# EAGLE board led-er-v3-module-f (EAGLE 7.5.0)
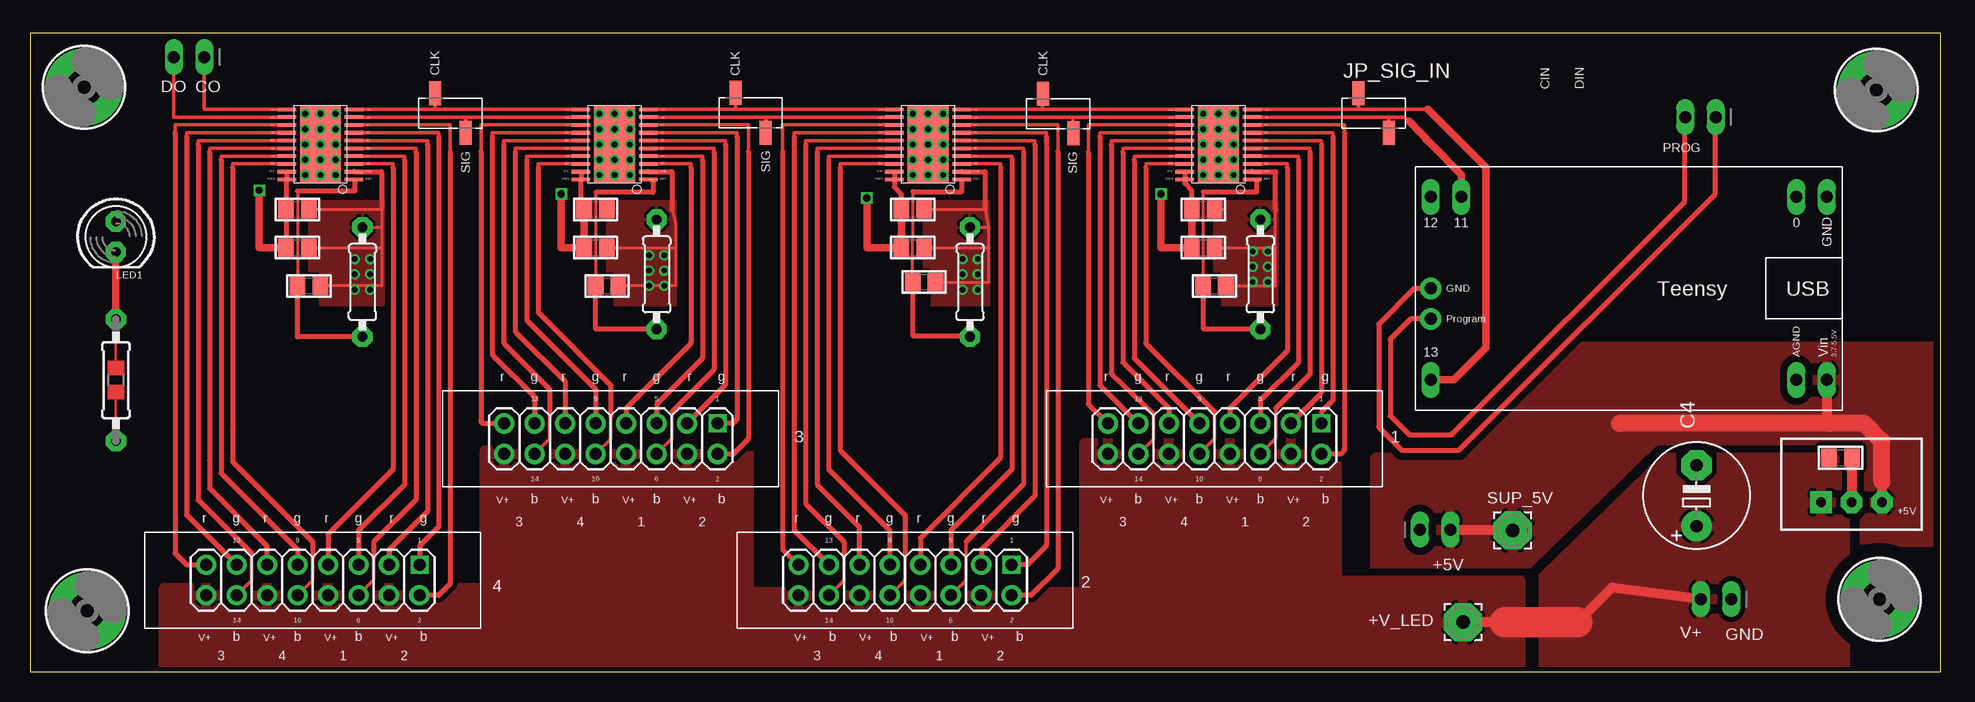
[diagram p0: board, top side]
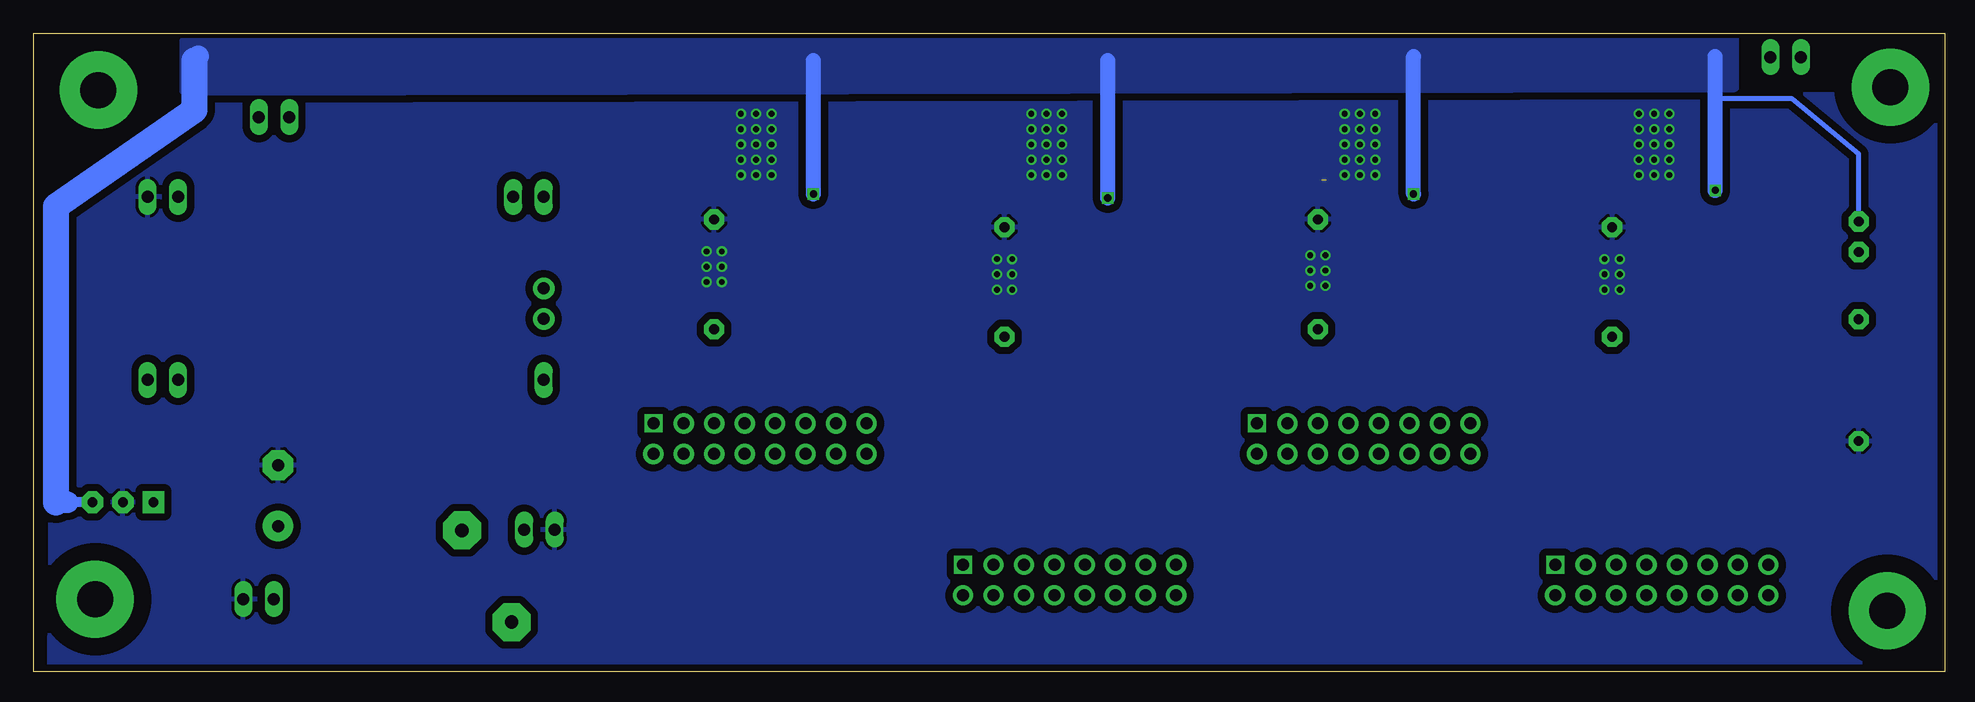
[diagram p1: board, bottom side, seen from below]

Size 159.28 x 53.23 mm. Coordinates in mm from the lower left corner, seen from the top.
Outline: 159.28,0 159.28,53.23 0,53.23 0,0 159.26,0
Copper layers (1*16): Top 0.0356mm / dielectric 1.5011mm / Bottom 0.0356mm
Design rules "LaenPCBOrder": minimum track width 6mil, minimum drill 13mil, track to track 6mil, track to pad 6mil, pad to pad 6mil, via to via 6mil, smd to smd 6mil, copper to edge 15mil, drill to drill 6mil, minimum pad ring 7mil, minimum via ring 7mil, stop-mask expansion 3mil, vias tented up to drill 0mil, thermal gap 10mil

## Footprints (pad centres in the part's own frame; a part is rotated, then mirrored left to right if it is on the bottom)
3,17/1,1 = drill 1.118 pad 3.175 octagon: 1 0,0
0805 = smd 1.3 x 1.5: 1 -0.95,0; 2 0.95,0
E5-8,5 = drill 1.016 pad 2.54: + -2.54,0 | drill 1.016 pad 2.54 octagon: - 2.54,0
1X06_SMD_STRAIGHT_ALT = smd 1 x 2: 1 0,-1.65; 2 -2.54,1.65
1X02_OVAL = drill 1 long: 1 -1.27,0; 2 1.27,0
LED5MM = drill 0.813 pad 1.676 octagon: A -1.27,0; K 1.27,0
0207/9 = drill 0.813 pad 1.676 octagon: 1 -4.572,0; 2 4.572,0
HTSSOP20DAP = smd 0.3 x 1.55: 1 -2.925,-2.8; 2 -2.275,-2.8; 3 -1.625,-2.8; 4 -0.975,-2.8; 5 -0.325,-2.8; 6 0.325,-2.8; 7 0.975,-2.8; 8 1.625,-2.8; 9 2.275,-2.8; 10 2.925,-2.8; 11 2.925,2.8; 12 2.275,2.8; 13 1.625,2.8; 14 0.975,2.8; 15 0.325,2.8; 16 -0.325,2.8; 17 -0.975,2.8; 18 -1.625,2.8; 19 -2.275,2.8; 20 -2.925,2.8 | smd 6.5 x 3.4: EXP 0,0
2X08_RIBBON = drill 1 pad 1.676: P1 -8.89,1.27; P3 -6.35,1.27; P4 -6.35,-1.27; P5 -3.81,1.27; P6 -3.81,-1.27; P7 -1.27,1.27; P8 -1.27,-1.27; P9 1.27,1.27; P10 1.27,-1.27; P11 3.81,1.27; P12 3.81,-1.27; P13 6.35,1.27; P14 6.35,-1.27; P15 8.89,1.27; P16 8.89,-1.27 | drill 1 square: P2 -8.89,-1.27
0805-THM = drill 0.813 pad 1.676 octagon: 1 -5.08,0; 2 5.08,0
TSR-1 = drill 0.8 pad 1.8 square: 1 -2.54,-1.5 | drill 0.8 pad 1.8 octagon: 2 0,-1.5; 3 2.54,-1.5
MOUNTINGHOLE_3.0_PLATED = drill 3 pad 6.452: P$1 0,0
TEENSY_LEDER = drill 1 pad 1.422 long: 0 12.7,7.62; 11 -15.24,7.62; 12 -17.78,7.62; 13 -17.78,-7.62; AGND 12.7,-7.62; GND 15.24,7.62; VIN 15.24,-7.62 | drill 1 pad 1.778: GND2 -17.78,0; PROG -17.78,-2.54

## Placement (x,y rotation side)
+V_LED  [3,17/1,1]  119.44,4.14 0 top
C3  10uF/16V  [0805]  150.92,17.84 0 top
C4  220uF+  [E5-8,5]  138.91,14.68 90 top
JP1  [1X06_SMD_STRAIGHT_ALT]  86.97,46.52 0 top
JP2  [1X06_SMD_STRAIGHT_ALT]  61.33,46.6 0 top
JP3  [1X06_SMD_STRAIGHT_ALT]  36.32,46.56 0 top
JP_5V  [1X02_OVAL]  117.13,11.85 0 top
JP_15VIN  [1X02_OVAL]  140.53,6.06 180 top
JP_PROG  [1X02_OVAL]  139.24,46.23 180 top
JP_SIG_IN  [1X06_SMD_STRAIGHT_ALT]  113.26,46.56 0 top
JP_SIGOUT  [1X02_OVAL]  13.25,51.24 180 top
LED1  Green  [LED5MM]  7.16,36.26 270 top
LED-ER1:C5  1uF/50V  [0805]  97.78,38.54 0 top
LED-ER1:C11  10uF 25V  [0805]  97.78,35.36 0 top
LED-ER1:R3  22K  [0805]  98.74,32.17 0 top
LED-ER1:R6  [0207/9]  102.56,33.13 90 top
LED-ER1:TLC1  TLC59711  [HTSSOP20DAP]  99.06,43.96 90 top
LED-ER1:U$6  HEADER-2X8-RIBBON  [2X08_RIBBON]  98.74,19.43 180 top
LED-ER2:C5  1uF/50V  [0805]  73.58,38.54 0 top
LED-ER2:C11  10uF 25V  [0805]  73.58,35.36 0 top
LED-ER2:R3  22K  [0805]  74.53,32.49 0 top
LED-ER2:R6  [0207/9]  78.35,32.49 90 top
LED-ER2:TLC1  TLC59711  [HTSSOP20DAP]  74.85,43.96 90 top
LED-ER2:U$6  HEADER-2X8-RIBBON  [2X08_RIBBON]  72.94,7.64 180 top
LED-ER3:C5  1uF/50V  [0805]  47.14,35.36 0 top
LED-ER3:C11  10uF 25V  [0805]  47.14,38.54 0 top
LED-ER3:R3  22K  [0805]  48.1,32.17 0 top
LED-ER3:R6  [0207/9]  52.24,33.13 90 top
LED-ER3:TLC1  TLC59711  [HTSSOP20DAP]  48.73,43.96 90 top
LED-ER3:U$6  HEADER-2X8-RIBBON  [2X08_RIBBON]  48.41,19.43 180 top
LED-ER4:C5  1uF/50V  [0805]  22.3,35.36 0 top
LED-ER4:C11  10uF 25V  [0805]  22.3,38.54 0 top
LED-ER4:R3  22K  [0805]  23.25,32.17 0 top
LED-ER4:R6  [0207/9]  27.71,32.49 90 top
LED-ER4:TLC1  TLC59711  [HTSSOP20DAP]  24.21,43.96 90 top
LED-ER4:U$6  HEADER-2X8-RIBBON  [2X08_RIBBON]  23.57,7.64 180 top
R2  470  [0805-THM]  7.16,24.31 90 top
SUP_5V  [3,17/1,1]  123.58,11.79 0 top
TSR1-2450  TSR1-2450  [TSR-1]  151.84,15.63 0 top
U$1  MOUNTINGHOLE  [MOUNTINGHOLE_3.0_PLATED]  153.89,48.48 0 top
U$2  MOUNTINGHOLE  [MOUNTINGHOLE_3.0_PLATED]  4.78,5.1 0 top
U$3  MOUNTINGHOLE  [MOUNTINGHOLE_3.0_PLATED]  4.51,48.72 0 top
U$4  MOUNTINGHOLE  [MOUNTINGHOLE_3.0_PLATED]  154.16,6.05 0 top
U$5  TEENSY_LEDER  [TEENSY_LEDER]  134.54,31.95 0 top

## Library data of the parts
+V_LED SUP_5V = wirepad
C3 JP_5V JP_15VIN JP_PROG JP_SIGOUT LED-ER1:C5 LED-ER1:C11 LED-ER1:R3 LED-ER2:C5 LED-ER2:C11 LED-ER2:R3 LED-ER3:C5 LED-ER3:C11 LED-ER3:R3 LED-ER4:C5 LED-ER4:C11 LED-ER4:R3 R2 U$1-U$4 = microbuilder
C4 LED1 LED-ER1:R6 LED-ER1:TLC1 LED-ER2:R6 LED-ER2:TLC1 LED-ER3:R6 LED-ER3:TLC1 LED-ER4:R6 LED-ER4:TLC1 = adafruit
JP1-JP3 JP_SIG_IN = Andrews; PROD_ID: CONN-10203
LED-ER1:U$6 LED-ER2:U$6 LED-ER3:U$6 LED-ER4:U$6 U$5 = Andrews
TSR1-2450 = SteelCaveRobotics-Power

## Nets
1SCKI: JP_SIG_IN.2 LED-ER1:TLC1.10 U$5.13
1SDTI: JP_SIG_IN.1 LED-ER1:TLC1.9 U$5.11
+5V: JP_5V.2 LED1.A LED-ER1:C5.1 LED-ER1:C11.1 LED-ER1:TLC1.19 LED-ER1:TLC1.20 LED-ER2:C5.1 LED-ER2:C11.1 LED-ER2:TLC1.19 LED-ER2:TLC1.20 LED-ER3:C5.1 LED-ER3:C11.1 LED-ER3:TLC1.19 LED-ER3:TLC1.20 LED-ER4:C5.1 LED-ER4:C11.1 LED-ER4:TLC1.19 LED-ER4:TLC1.20 SUP_5V.1 TSR1-2450.3 U$5.VIN
GND: C3.2 C4.- JP_5V.1 JP_15VIN.1 LED-ER1:C5.2 LED-ER1:C11.2 LED-ER1:R3.2 LED-ER1:R6.2 LED-ER1:TLC1.2 LED-ER1:TLC1.EXP LED-ER2:C5.2 LED-ER2:C11.2 LED-ER2:R3.2 LED-ER2:R6.2 LED-ER2:TLC1.2 LED-ER2:TLC1.EXP LED-ER3:C5.2 LED-ER3:C11.2 LED-ER3:R3.2 LED-ER3:R6.2 LED-ER3:TLC1.2 LED-ER3:TLC1.EXP LED-ER4:C5.2 LED-ER4:C11.2 LED-ER4:R3.2 LED-ER4:R6.2 LED-ER4:TLC1.2 LED-ER4:TLC1.EXP R2.1 TSR1-2450.2 U$5.GND
LED-ER1:B0: LED-ER1:TLC1.5 LED-ER1:U$6.P5
LED-ER1:B1: LED-ER1:TLC1.8 LED-ER1:U$6.P1
LED-ER1:B2: LED-ER1:TLC1.15 LED-ER1:U$6.P13
LED-ER1:B3: LED-ER1:TLC1.18 LED-ER1:U$6.P9
LED-ER1:G0: LED-ER1:TLC1.4 LED-ER1:U$6.P6
LED-ER1:G1: LED-ER1:TLC1.7 LED-ER1:U$6.P2
LED-ER1:G2: LED-ER1:TLC1.14 LED-ER1:U$6.P14
LED-ER1:G3: LED-ER1:TLC1.17 LED-ER1:U$6.P10
LED-ER1:IREF: LED-ER1:R3.1 LED-ER1:R6.1 LED-ER1:TLC1.1
LED-ER1:R0: LED-ER1:TLC1.3 LED-ER1:U$6.P8
LED-ER1:R1: LED-ER1:TLC1.6 LED-ER1:U$6.P4
LED-ER1:R2: LED-ER1:TLC1.13 LED-ER1:U$6.P16
LED-ER1:R3: LED-ER1:TLC1.16 LED-ER1:U$6.P12
LED-ER2:B0: LED-ER2:TLC1.5 LED-ER2:U$6.P5
LED-ER2:B1: LED-ER2:TLC1.8 LED-ER2:U$6.P1
LED-ER2:B2: LED-ER2:TLC1.15 LED-ER2:U$6.P13
LED-ER2:B3: LED-ER2:TLC1.18 LED-ER2:U$6.P9
LED-ER2:G0: LED-ER2:TLC1.4 LED-ER2:U$6.P6
LED-ER2:G1: LED-ER2:TLC1.7 LED-ER2:U$6.P2
LED-ER2:G2: LED-ER2:TLC1.14 LED-ER2:U$6.P14
LED-ER2:G3: LED-ER2:TLC1.17 LED-ER2:U$6.P10
LED-ER2:IREF: LED-ER2:R3.1 LED-ER2:R6.1 LED-ER2:TLC1.1
LED-ER2:R0: LED-ER2:TLC1.3 LED-ER2:U$6.P8
LED-ER2:R1: LED-ER2:TLC1.6 LED-ER2:U$6.P4
LED-ER2:R2: LED-ER2:TLC1.13 LED-ER2:U$6.P16
LED-ER2:R3: LED-ER2:TLC1.16 LED-ER2:U$6.P12
LED-ER3:B0: LED-ER3:TLC1.5 LED-ER3:U$6.P5
LED-ER3:B1: LED-ER3:TLC1.8 LED-ER3:U$6.P1
LED-ER3:B2: LED-ER3:TLC1.15 LED-ER3:U$6.P13
LED-ER3:B3: LED-ER3:TLC1.18 LED-ER3:U$6.P9
LED-ER3:G0: LED-ER3:TLC1.4 LED-ER3:U$6.P6
LED-ER3:G1: LED-ER3:TLC1.7 LED-ER3:U$6.P2
LED-ER3:G2: LED-ER3:TLC1.14 LED-ER3:U$6.P14
LED-ER3:G3: LED-ER3:TLC1.17 LED-ER3:U$6.P10
LED-ER3:IREF: LED-ER3:R3.1 LED-ER3:R6.1 LED-ER3:TLC1.1
LED-ER3:R0: LED-ER3:TLC1.3 LED-ER3:U$6.P8
LED-ER3:R1: LED-ER3:TLC1.6 LED-ER3:U$6.P4
LED-ER3:R2: LED-ER3:TLC1.13 LED-ER3:U$6.P16
LED-ER3:R3: LED-ER3:TLC1.16 LED-ER3:U$6.P12
LED-ER4:B0: LED-ER4:TLC1.5 LED-ER4:U$6.P5
LED-ER4:B1: LED-ER4:TLC1.8 LED-ER4:U$6.P1
LED-ER4:B2: LED-ER4:TLC1.15 LED-ER4:U$6.P13
LED-ER4:B3: LED-ER4:TLC1.18 LED-ER4:U$6.P9
LED-ER4:G0: LED-ER4:TLC1.4 LED-ER4:U$6.P6
LED-ER4:G1: LED-ER4:TLC1.7 LED-ER4:U$6.P2
LED-ER4:G2: LED-ER4:TLC1.14 LED-ER4:U$6.P14
LED-ER4:G3: LED-ER4:TLC1.17 LED-ER4:U$6.P10
LED-ER4:IREF: LED-ER4:R3.1 LED-ER4:R6.1 LED-ER4:TLC1.1
LED-ER4:R0: LED-ER4:TLC1.3 LED-ER4:U$6.P8
LED-ER4:R1: LED-ER4:TLC1.6 LED-ER4:U$6.P4
LED-ER4:R2: LED-ER4:TLC1.13 LED-ER4:U$6.P16
LED-ER4:R3: LED-ER4:TLC1.16 LED-ER4:U$6.P12
N$1: LED1.K R2.2
N$2: JP1.2 LED-ER1:TLC1.11 LED-ER2:TLC1.10
N$3: JP1.1 LED-ER1:TLC1.12 LED-ER2:TLC1.9
N$4: JP2.2 LED-ER2:TLC1.11 LED-ER3:TLC1.10
N$5: JP2.1 LED-ER2:TLC1.12 LED-ER3:TLC1.9
N$6: JP3.2 LED-ER3:TLC1.11 LED-ER4:TLC1.10
N$7: JP3.1 LED-ER3:TLC1.12 LED-ER4:TLC1.9
N$8: JP_SIGOUT.1 LED-ER4:TLC1.11
N$9: JP_SIGOUT.2 LED-ER4:TLC1.12
N$54: JP_PROG.1 U$5.GND2
N$55: JP_PROG.2 U$5.PROG
VIN: +V_LED.1 C3.1 C4.+ JP_15VIN.2 LED-ER1:U$6.P3 LED-ER1:U$6.P7 LED-ER1:U$6.P11 LED-ER1:U$6.P15 LED-ER2:U$6.P3 LED-ER2:U$6.P7 LED-ER2:U$6.P11 LED-ER2:U$6.P15 LED-ER3:U$6.P3 LED-ER3:U$6.P7 LED-ER3:U$6.P11 LED-ER3:U$6.P15 LED-ER4:U$6.P3 LED-ER4:U$6.P7 LED-ER4:U$6.P11 LED-ER4:U$6.P15 TSR1-2450.1

## Tracks (layer width: path | path; a pad name or v marks a point on that pad's centre or on a via)
1SCKI
  Top 0.305: LED-ER1:TLC1.10 110.72,46.88 | 110.72,46.88 116.52,46.88 | U$5.13 | JP_SIG_IN.2 110.72,46.88
  Top 0.61: 116.52,46.88 121.36,42.04 121.36,27.01 118.68,24.33 U$5.13
1SDTI
  Top 0.305: LED-ER1:TLC1.9 113.26,46.23 | 113.26,46.23 114.62,46.23 114.98,45.87 | 119.31,39.58 U$5.11 | JP_SIG_IN.1 113.26,46.23
  Top 0.61: 116.37,44.38 116.85,43.91 | 116.85,43.91 119.31,41.45 119.31,39.58 | 114.98,45.87 116.85,43.91
+5V  (via drill 0.6)
  Top 0.254: LED-ER1:TLC1.20 | LED-ER3:TLC1.20 46.19,41.03 | LED-ER4:TLC1.20 21.35,41.03 | LED-ER2:C5.1 | LED-ER3:C11.1
  Top 0.305: LED-ER1:C5.1 | LED-ER2:C5.1 | LED-ER4:TLC1.19 21.41,41.55 | LED-ER3:TLC1.19 45.93,41.57 | LED-ER2:TLC1.19 | LED-ER2:TLC1.19 72.05,41.58 | LED-ER1:TLC1.19 | LED-ER1:TLC1.19 96.26,41.59
  Top 0.406: LED-ER4:C5.1 LED-ER4:C11.1 21.41,38.54 LED-ER4:TLC1.20 21.41,41.55 | LED-ER1:C5.1 96.83,40.13 96.26,40.7 LED-ER1:TLC1.20 96.26,41.59 | LED-ER2:C5.1 72.62,39.81 72.05,40.38 LED-ER2:TLC1.20 72.05,41.58 | LED-ER3:C11.1 45.93,38.54 LED-ER3:TLC1.20 45.93,41.57 | 72.05,41.58 | 96.26,41.59 | LED-ER1:C11.1 | LED-ER2:C11.1
  Top 0.61: v94.28,39.81 94.28,35.35 LED-ER1:C11.1 LED-ER1:C5.1 | v69.75,39.5 69.75,35.35 LED-ER2:C11.1 LED-ER2:C5.1 | LED-ER3:C11.1 LED-ER3:C5.1 44.27,35.35 v44.27,39.81 | LED-ER4:C5.1 19.11,35.35 v19.11,40.13
  Top 0.813: TSR1-2450.3 154.38,15.85 154.36,15.88 | U$5.VIN 149.78,20.95 150.02,20.7 | SUP_5V.1 118.46,11.79 JP_5V.2
  Top 1.422: 154.36,15.88 154.36,19.23 152.89,20.7 150.02,20.7 132.5,20.7
  Bottom 0.406: LED1.A 7.16,43.15 12.74,47.78 19.11,47.78
  Bottom 0.813: TSR1-2450.3 156.05,14.13 156.46,14.14
  Bottom 1.27: v94.28,39.81 94.28,50.96 | v69.75,39.5 69.75,50.96 | v44.27,39.81 44.27,51.28 | v19.11,40.13 19.11,47.78 19.11,51.28
  Bottom 1.778: 156.46,14.14 157.41,14.11 | 145.88,50.96 145.56,51.28
  Bottom 2.184: 157.41,14.11 157.41,38.8 145.88,46.82 145.88,50.96
  pour Bottom (isolate 0.305): 17.52,48.73 17.52,52.87 146.72,52.56 146.72,48.41
  pour Top (isolate 0.61, rank 3): 112.12,17.84 112.12,8.6 124.86,8.6 136.01,19.11 152.89,19.11 152.89,10.83 158.94,10.83 158.94,27.07 129,27.07 119.76,17.84
GND  (via drill 0.48)  (3 unrouted)
  Top 0.254: LED-ER1:TLC1.2 | LED-ER1:R3.2 103.83,32.17 103.83,35.35 | 103.83,35.35 103.83,38.54 | LED-ER2:C5.2 | LED-ER2:R3.2 79.95,32.49 79.95,35.35 | 79.95,35.35 79.95,37.06 | 79.95,37.06 79.63,38.54 LED-ER2:C5.2 | LED-ER2:R6.2 79.95,37.06 | 53.51,38.54 53.83,37.38 53.83,35.35 | 53.83,35.35 53.83,32.17 v52.87,32.17 v51.6,32.17 LED-ER3:R3.2 | LED-ER3:R3.2 | 29.3,37.06 29.3,38.54 LED-ER4:C11.2 | 29.3,37.06 29.3,35.35 | 29.3,35.35 29.3,32.17 LED-ER4:R3.2 | LED-ER4:R6.2 29.3,37.06 | LED-ER4:C5.2 29.3,35.35 | LED-ER3:C5.2 53.83,35.35 | LED-ER2:C11.2 79.95,35.35 | LED-ER1:C11.2 103.83,35.35
  Top 0.305: 29.3,41.68 29.3,41.63 | 53.51,41.68 53.51,41.62 | 103.83,41.68 103.83,41.62
  Top 0.406: 103.83,38.54 103.83,41.62 | 79.63,38.54 79.63,41.68 LED-ER2:TLC1.2 | 53.51,41.62 53.51,38.54 | 29.3,41.63 29.3,38.54 | LED-ER4:TLC1.2 29.3,41.68 | LED-ER3:TLC1.2 53.51,41.68 | LED-ER1:TLC1.2 103.83,41.68
  Top 0.813: C3.2 151.87,14.13 TSR1-2450.2
  other vias: 22.93,46.5 24.21,46.5 25.48,46.5 22.93,45.23 24.21,45.23 22.93,43.96 24.21,43.96 25.48,43.96 22.93,42.68 24.21,42.68 25.48,42.68 22.93,41.41 24.21,41.41 25.48,41.41 25.48,45.23 97.78,46.5 99.06,46.5 100.33,46.5 97.78,45.23 99.06,45.23 100.33,45.23 97.78,43.96 99.06,43.96 100.33,43.96 97.78,42.68 99.06,42.68 100.33,42.68 97.78,41.41 99.06,41.41 100.33,41.41 73.58,46.5 74.85,46.5 76.13,46.5 73.58,45.23 74.85,45.23 76.13,45.23 73.58,43.96 74.85,43.96 76.13,43.96 73.58,42.68 74.85,42.68 76.13,42.68 73.58,41.41 74.85,41.41 76.13,41.41 47.46,46.5 48.73,46.5 50.01,46.5 47.46,45.23 48.73,45.23 47.46,43.96 48.73,43.96 50.01,43.96 47.46,42.68 48.73,42.68 50.01,42.68 47.46,41.41 48.73,41.41 50.01,41.41 50.01,45.23 27.07,34.4 27.07,33.13 28.35,33.13 27.07,31.85 28.35,31.85 28.35,34.4 51.6,34.72 52.87,34.72 51.6,33.44 52.87,33.44 77.72,34.4 77.72,33.13 77.72,31.85 78.99,31.85 78.99,33.13 78.99,34.4 101.93,35.04 103.2,35.04 101.93,33.76 103.2,33.76 101.93,32.49 103.2,32.49
  pour Top: 98.74,39.18 98.74,33.44 99.38,33.44 99.38,30.58 104,30.56 104,39.16
  pour Top: 74.53,39.18 74.53,33.76 75.17,33.76 75.17,30.58 79.95,30.58 79.95,39.18
  pour Top: 48.1,33.44 48.73,33.44 48.73,30.58 53.83,30.58 53.83,39.18 48.1,39.18
  pour Top: 23.25,39.18 23.25,33.44 24.21,33.44 24.21,30.58 29.46,30.61 29.46,39.21
  pour Bottom (isolate 0.61, rank 2): 0,48.1 157.67,48.1 157.98,0 0,0
LED-ER1:B0
  Top 0.305: LED-ER1:TLC1.5 106.7,43.63 106.7,43.31 | 103.84,21.98 103.84,19.55 arc-45 103.76,19.37 LED-ER1:U$6.P5
  Top 0.406: 106.7,43.31 106.7,24.95 arc-45 106.63,24.77 103.84,21.98
LED-ER1:B1
  Top 0.305: LED-ER1:TLC1.8 109.57,45.58 109.57,44.59
  Top 0.406: 109.57,44.94 109.57,44.59 109.57,18.58 arc-45 109.5,18.4 109.25,18.16 LED-ER1:U$6.P1 arc-45 LED-ER1:U$6.P1
LED-ER1:B2
  Top 0.305: LED-ER1:TLC1.15 90.14,44.28 90.14,43.96 | 93.67,21.51 93.67,19.54 arc-45 93.59,19.36 LED-ER1:U$6.P13
  Top 0.406: 90.14,43.96 90.14,24.95 arc45 90.21,24.77 93.67,21.51
LED-ER1:B3
  Top 0.305: LED-ER1:TLC1.18 93.01,42.33 93.01,42.01 | 98.74,21.66 98.74,19.54 arc-45 98.67,19.36 LED-ER1:U$6.P9
  Top 0.406: 93.01,42.01 93.01,27.5 arc45 93.08,27.32 98.74,21.66
LED-ER1:G0
  Top 0.305: LED-ER1:TLC1.4 105.75,42.98 105.75,42.66
  Top 0.406: 105.75,42.66 105.75,25.91 arc-45 105.67,25.73 102.56,22.61 102.56,20.73 arc-45 LED-ER1:U$6.P6
LED-ER1:G1
  Top 0.305: LED-ER1:TLC1.7 108.61,44.93 108.61,44.61
  Top 0.406: 108.61,44.61 108.61,22.72 arc-45 108.54,22.54 107.66,21.66 107.66,20.77 arc-45 LED-ER1:U$6.P2
LED-ER1:G2
  Top 0.305: LED-ER1:TLC1.14 89.18,44.93 89.18,44.61
  Top 0.406: 89.18,44.61 89.18,23.89 91.1,21.98 arc-45 91.12,21.97 LED-ER1:U$6.P14
LED-ER1:G3
  Top 0.305: LED-ER1:TLC1.17 92.05,42.98 92.05,42.66
  Top 0.406: 92.05,42.66 92.05,26.22 arc45 92.13,26.04 LED-ER1:U$6.P10
LED-ER1:IREF
  Top 0.254: LED-ER1:TLC1.1 102.24,41.03 | 97.79,39.97 LED-ER1:R3.1 | 102.56,28.6 LED-ER1:R6.1
  Top 0.305: 102.24,41.03 102.24,40.91
  Top 0.406: 97.79,39.97 102.24,39.97 102.24,40.91 | LED-ER1:R3.1 97.78,28.6 102.56,28.6
LED-ER1:R0
  Top 0.305: LED-ER1:TLC1.3 104.79,42.33 104.79,42.01
  Top 0.406: 104.79,42.01 104.79,26.75 100.01,21.98 LED-ER1:U$6.P8 arc-45 LED-ER1:U$6.P8
LED-ER1:R1
  Top 0.305: LED-ER1:TLC1.6 107.66,44.28 107.66,43.96
  Top 0.406: 107.66,43.96 107.66,23.37 arc-45 107.58,23.19 LED-ER1:U$6.P4
LED-ER1:R2
  Top 0.305: LED-ER1:TLC1.13 88.23,45.58 88.23,43.32
  Top 0.406: LED-ER1:U$6.P16 88.23,22.32 88.23,43.32 | 88.23,43.32
LED-ER1:R3
  Top 0.305: LED-ER1:TLC1.16 91.1,43.63 91.1,43.31
  Top 0.406: 91.1,43.31 91.1,25.8 94.92,21.98 94.92,20.73 arc45 LED-ER1:U$6.P12
LED-ER2:B0
  Top 0.305: LED-ER2:TLC1.5 82.81,43.63 82.81,43 | 78.04,10.83 78.04,7.77 arc-45 77.96,7.59 LED-ER2:U$6.P5
  Top 0.406: 82.81,43.31 82.81,43 82.81,15.71 arc-45 82.74,15.53 78.04,10.83
LED-ER2:B1
  Top 0.305: LED-ER2:TLC1.8 85.68,45.58 85.68,43.35
  Top 0.406: 85.68,43.35 85.68,8.71 arc-45 85.61,8.53 83.45,6.37 LED-ER2:U$6.P1 arc-45 LED-ER2:U$6.P1
LED-ER2:B2
  Top 0.305: LED-ER2:TLC1.15 64.66,44.28 64.66,43.96 | 67.84,9.87 67.85,7.76 arc-45 67.77,7.55 LED-ER2:U$6.P13
  Top 0.406: 64.66,43.96 64.66,16.67 64.66,14.02 67.84,10.83 67.84,9.87
LED-ER2:B3
  Top 0.305: LED-ER2:TLC1.18 67.53,42.33 67.53,42.01 | 72.94,9.87 72.94,7.75 arc-45 72.87,7.57 LED-ER2:U$6.P9
  Top 0.406: 67.53,42.01 67.53,21.13 67.53,18.47 72.94,13.06 72.94,9.87
LED-ER2:G0
  Top 0.305: LED-ER2:TLC1.4 81.86,42.98 81.86,42.68
  Top 0.406: 81.86,42.68 81.86,16.99 arc-45 81.78,16.81 76.76,11.79 76.76,8.94 arc-45 LED-ER2:U$6.P6
LED-ER2:G1
  Top 0.305: LED-ER2:TLC1.7 84.72,44.93 84.72,44.27
  Top 0.406: 84.72,44.61 84.72,44.27 84.72,10.62 arc-45 84.65,10.44 83.13,8.92 LED-ER2:U$6.P2 arc45 LED-ER2:U$6.P2
LED-ER2:G2
  Top 0.305: LED-ER2:TLC1.14 63.7,44.93 63.7,44.27
  Top 0.406: 63.7,44.61 63.7,44.27 63.7,15.71 63.7,11.8 LED-ER2:U$6.P14
LED-ER2:G3
  Top 0.305: LED-ER2:TLC1.17 66.57,42.98 66.57,42.36
  Top 0.406: 66.57,42.66 66.57,42.36 66.57,20.49 66.57,16.88 71.67,11.79 LED-ER2:U$6.P10
LED-ER2:IREF
  Top 0.254: 73.58,40.02 LED-ER2:R3.1 | 78.36,28.03 LED-ER2:R6.1
  Top 0.305: LED-ER2:TLC1.1 77.65,40.88
  Top 0.406: 73.58,40.02 77.66,40.02 77.65,40.88 | LED-ER2:R3.1 73.58,28.03 78.36,28.03
LED-ER2:R0
  Top 0.305: LED-ER2:TLC1.3 80.9,42.33 80.9,41.73
  Top 0.406: 80.9,42.01 80.9,41.73 80.9,17.94 arc-45 80.83,17.76 74.21,11.15 74.21,8.92 arc-45 LED-ER2:U$6.P8
LED-ER2:R1
  Top 0.305: LED-ER2:TLC1.6 83.77,44.28 83.77,43.96
  Top 0.406: 83.77,43.96 83.77,14.76 arc-45 83.69,14.58 79.31,10.19 79.31,8.96 arc-45 LED-ER2:U$6.P4
LED-ER2:R2
  Top 0.305: LED-ER2:TLC1.13 62.75,45.58 62.75,43.35
  Top 0.406: 62.75,43.35 62.75,14.76 62.75,10.22 LED-ER2:U$6.P16
LED-ER2:R3
  Top 0.305: LED-ER2:TLC1.16 65.61,43.63 65.61,43.31
  Top 0.406: 65.61,43.31 65.61,17.94 65.61,15.61 69.12,12.1 69.12,8.93 LED-ER2:U$6.P12
LED-ER3:B0
  Top 0.305: LED-ER3:TLC1.5 57.01,43.63 57.01,43.31 | 53.51,21.66 53.51,19.55 arc-45 53.44,19.37 LED-ER3:U$6.P5
  Top 0.406: 57.01,43.31 57.01,25.27 arc-45 56.94,25.09 53.51,21.66
LED-ER3:B1
  Top 0.305: LED-ER3:TLC1.8 59.88,45.58 59.88,43.35
  Top 0.406: 59.88,43.35 59.88,19.54 arc-45 59.81,19.36 58.61,18.16 57.31,18.16 arc-45 LED-ER3:U$6.P1
LED-ER3:B2
  Top 0.305: LED-ER3:TLC1.15 39.5,44.28 39.5,43.96 | 43.32,21.34 43.32,19.52 arc-45 43.24,19.34 LED-ER3:U$6.P13
  Top 0.406: 39.5,43.96 39.5,27.5 arc45 39.57,27.32 43.32,23.57 43.32,21.34
LED-ER3:B3
  Top 0.305: LED-ER3:TLC1.18 42.36,42.33 42.36,42.01 | 48.41,21.34 48.41,19.54 arc-45 48.34,19.36 LED-ER3:U$6.P9
  Top 0.406: 42.36,42.01 42.36,30.05 arc45 42.44,29.87 48.41,23.89 48.41,21.34
LED-ER3:G0
  Top 0.305: LED-ER3:TLC1.4 56.06,42.98 56.06,42.66
  Top 0.406: 56.06,42.66 56.06,26.22 arc-45 55.98,26.04 52.24,22.3 52.24,20.73 arc-45 LED-ER3:U$6.P6
LED-ER3:G1
  Top 0.305: LED-ER3:TLC1.7 58.92,44.93 58.92,44.61
  Top 0.406: 58.92,44.61 58.92,21.13 arc-45 58.85,20.95 58.61,20.7 57.31,20.7 arc45 LED-ER3:U$6.P2
LED-ER3:G2
  Top 0.305: LED-ER3:TLC1.14 38.54,44.93 38.54,44.61
  Top 0.406: 38.54,44.61 38.54,26.54 arc45 38.62,26.36 42.04,22.93 42.04,20.75 arc45 LED-ER3:U$6.P14
LED-ER3:G3
  Top 0.305: LED-ER3:TLC1.17 41.41,42.98 41.41,42.66
  Top 0.406: 41.41,42.66 41.41,29.41 arc45 41.48,29.23 47.14,23.57 LED-ER3:U$6.P10 arc45 LED-ER3:U$6.P10
LED-ER3:IREF  (1 unrouted)
  Top 0.254: 47.15,39.96 LED-ER3:R3.1
  Top 0.305: 51.92,41.03 51.92,40.84
  Top 0.406: 47.15,39.96 51.92,39.96 51.92,40.84 | LED-ER3:R6.1 47.15,28.55 LED-ER3:R3.1
LED-ER3:R0
  Top 0.305: LED-ER3:TLC1.3 55.1,42.33 55.1,42.01
  Top 0.406: 55.1,42.01 55.1,27.5 arc-45 55.03,27.32 49.69,21.98 LED-ER3:U$6.P8 arc-45 LED-ER3:U$6.P8
LED-ER3:R1
  Top 0.305: LED-ER3:TLC1.6 57.97,44.28 57.97,43.96
  Top 0.406: 57.97,43.96 57.97,24.01 arc-45 57.9,23.83 LED-ER3:U$6.P4
LED-ER3:R2
  Top 0.305: LED-ER3:TLC1.13 37.59,45.58 37.59,43.35
  Top 0.406: 37.59,43.35 37.59,20.95 arc90 37.84,20.7 LED-ER3:U$6.P16
LED-ER3:R3
  Top 0.305: LED-ER3:TLC1.16 40.45,43.63 40.45,43.32
  Top 0.406: 40.45,43.32 40.45,28.45 arc45 40.53,28.27 44.59,24.21 44.59,20.73 arc45 LED-ER3:U$6.P12
LED-ER4:B0
  Top 0.305: LED-ER4:TLC1.5 32.17,43.63 32.17,43.31 | 28.67,9.55 28.67,7.66 LED-ER4:U$6.P5
  Top 0.406: 32.17,43.31 32.17,14.33 28.67,10.83 28.67,9.55
LED-ER4:B1
  Top 0.305: LED-ER4:TLC1.8 35.04,45.58 35.04,43.35
  Top 0.406: 35.04,43.35 35.04,7.33 34.08,6.37 LED-ER4:U$6.P1
LED-ER4:B2
  Top 0.305: LED-ER4:TLC1.15 14.02,44.28 14.02,43.96 | 18.47,9.87 18.47,7.63 LED-ER4:U$6.P13
  Top 0.406: 14.02,43.96 14.02,14.33 18.47,9.87
LED-ER4:B3
  Top 0.305: LED-ER4:TLC1.18 16.88,42.33 16.88,42.01 | 23.57,9.55 23.57,7.64 LED-ER4:U$6.P9
  Top 0.406: 16.88,42.01 16.88,20.17 16.88,17.52 23.57,10.83 23.57,9.55
LED-ER4:G0
  Top 0.305: LED-ER4:TLC1.4 31.21,42.98 31.21,42.66
  Top 0.406: 31.21,42.66 31.21,15.61 27.39,11.79 27.39,8.93 LED-ER4:U$6.P6
LED-ER4:G1
  Top 0.305: LED-ER4:TLC1.7 34.08,44.93 34.08,44.61
  Top 0.406: 34.08,44.61 34.08,12.1 32.49,10.51 32.49,8.94 LED-ER4:U$6.P2
LED-ER4:G2
  Top 0.305: LED-ER4:TLC1.14 13.06,44.93 13.06,44.61
  Top 0.406: 13.06,44.61 13.06,13.07 LED-ER4:U$6.P14
LED-ER4:G3
  Top 0.305: LED-ER4:TLC1.17 15.93,42.98 15.93,42.66
  Top 0.406: 15.93,42.66 15.93,16.56 22.3,10.19 LED-ER4:U$6.P10
LED-ER4:IREF
  Top 0.254: LED-ER4:TLC1.1 27.07,41.03 | 22.3,40.06 LED-ER4:R3.1
  Top 0.305: 27.07,41.03 27.07,40.83
  Top 0.406: 22.3,40.06 27.07,40.06 27.07,40.83 | LED-ER4:R6.1 22.3,27.92 LED-ER4:R3.1
LED-ER4:R0
  Top 0.305: LED-ER4:TLC1.3 30.26,42.33 30.26,42.01
  Top 0.406: 30.26,42.01 30.26,16.88 24.84,11.47 LED-ER4:U$6.P8
LED-ER4:R1
  Top 0.305: LED-ER4:TLC1.6 33.13,44.28 33.13,43.96
  Top 0.406: 33.13,43.96 33.13,13.38 29.94,10.19 29.94,8.94 LED-ER4:U$6.P4
LED-ER4:R2
  Top 0.305: LED-ER4:TLC1.13 12.1,45.58 12.1,44.91
  Top 0.406: 12.1,44.94 12.1,44.91 12.1,9.87 13.06,8.92 LED-ER4:U$6.P16
LED-ER4:R3
  Top 0.305: LED-ER4:TLC1.16 14.97,43.63 14.97,43.31
  Top 0.406: 14.97,43.31 14.97,17.62 14.97,15.29 19.75,10.51 19.75,8.93 LED-ER4:U$6.P12
N$1
  Top 0.305: R2.2
  Top 0.61: LED1.K R2.2
N$2
  Top 0.305: LED-ER2:TLC1.10 84.41,46.88 | 84.41,46.88 LED-ER1:TLC1.11 | LED-ER1:TLC1.11 | JP1.2 84.41,48.15 84.41,46.88
N$3
  Top 0.305: LED-ER2:TLC1.9 86.95,46.23 | 86.95,46.23 LED-ER1:TLC1.12 | LED-ER1:TLC1.12 | JP1.1 86.95,44.85 86.95,46.23
N$4
  Top 0.305: LED-ER2:TLC1.11 58.81,46.88 | 58.81,46.88 LED-ER3:TLC1.10 | JP2.2 58.81,48.21 58.81,46.88
N$5
  Top 0.305: LED-ER3:TLC1.9 61.37,46.23 | 61.37,46.23 LED-ER2:TLC1.12 | JP2.1 61.37,44.91 61.37,46.23
N$6
  Top 0.305: LED-ER3:TLC1.11 33.76,46.88 | 33.76,46.88 LED-ER4:TLC1.10 | JP3.2 33.76,48.23 33.76,46.88
N$7
  Top 0.305: LED-ER4:TLC1.9 36.31,46.23 | 36.31,46.23 LED-ER3:TLC1.12 | JP3.1 36.31,44.93 36.31,46.23
N$8
  Top 0.305: JP_SIGOUT.1 14.52,46.88 LED-ER4:TLC1.11
N$9
  Top 0.305: LED-ER4:TLC1.12 11.98,46.23 JP_SIGOUT.2
N$54
  Top 0.406: JP_PROG.1 140.47,46.19 140.47,39.81 119.12,18.47 114.35,18.47 112.44,20.39 112.44,28.98 115.41,31.95 U$5.GND2
N$55
  Top 0.406: U$5.PROG 115.09,29.41 113.39,27.71 113.39,21.34 114.98,19.75 118.49,19.75 137.92,39.18 137.92,46.18 JP_PROG.2
VIN
  Top 0.813: JP_15VIN.2 131.87,7.02 129,4.14 | 122.95,4.14 +V_LED.1 | +V_LED.1
  Top 2.54: 129,4.14 122.95,4.14
  pour Top (isolate 0.406): 87.91,19.11 108.93,19.11 108.93,7.64 124.22,7.64 124.22,0.32 11.15,0.32 11.15,7.01 37.9,7.01 37.9,18.47 59.88,18.47 59.88,6.69 87.91,6.69
  pour Top (isolate 0.406): 126.13,0.32 151.3,0.32 151.3,16.88 150.34,17.84 136.32,17.84 126.13,7.96

## Text on the board
tPlace: CLK | CLK | CLK | CIN | DIN | DO | CO | PROG | SIG | SIG | SIG | r | g | r | g | r | g | r | g | r | g | r | g | r | g | r | g | 3 | 1 | V+ | b | V+ | b | V+ | b | V+ | b | V+ | b | V+ | b | V+ | b | V+ | b | r | g | r | g | r | g | r | g | 3 | 4 | 1 | 2 | r | g | r | g | r | g | r | g | 3 | 4 | 1 | 2 | +5V | 4 | 2 | GND | V+ | b | V+ | b | V+ | b | V+ | b | V+ | b | V+ | b | V+ | b | V+ | b | V+ | 3 | 4 | 1 | 2 | 3 | 4 | 1 | 2